# Altium PCB STM32WB55_DB_QFN68_IPD.PcbDoc
Units mm, origin at the board's own origin, x right, y up, seen from the top; angles counter-clockwise.
Board outline 30 x 40 mm, 2 copper layers (L1, L2), stack 1.57 mm thick; 32 components, 34 nets, 154 pads, 303 vias.
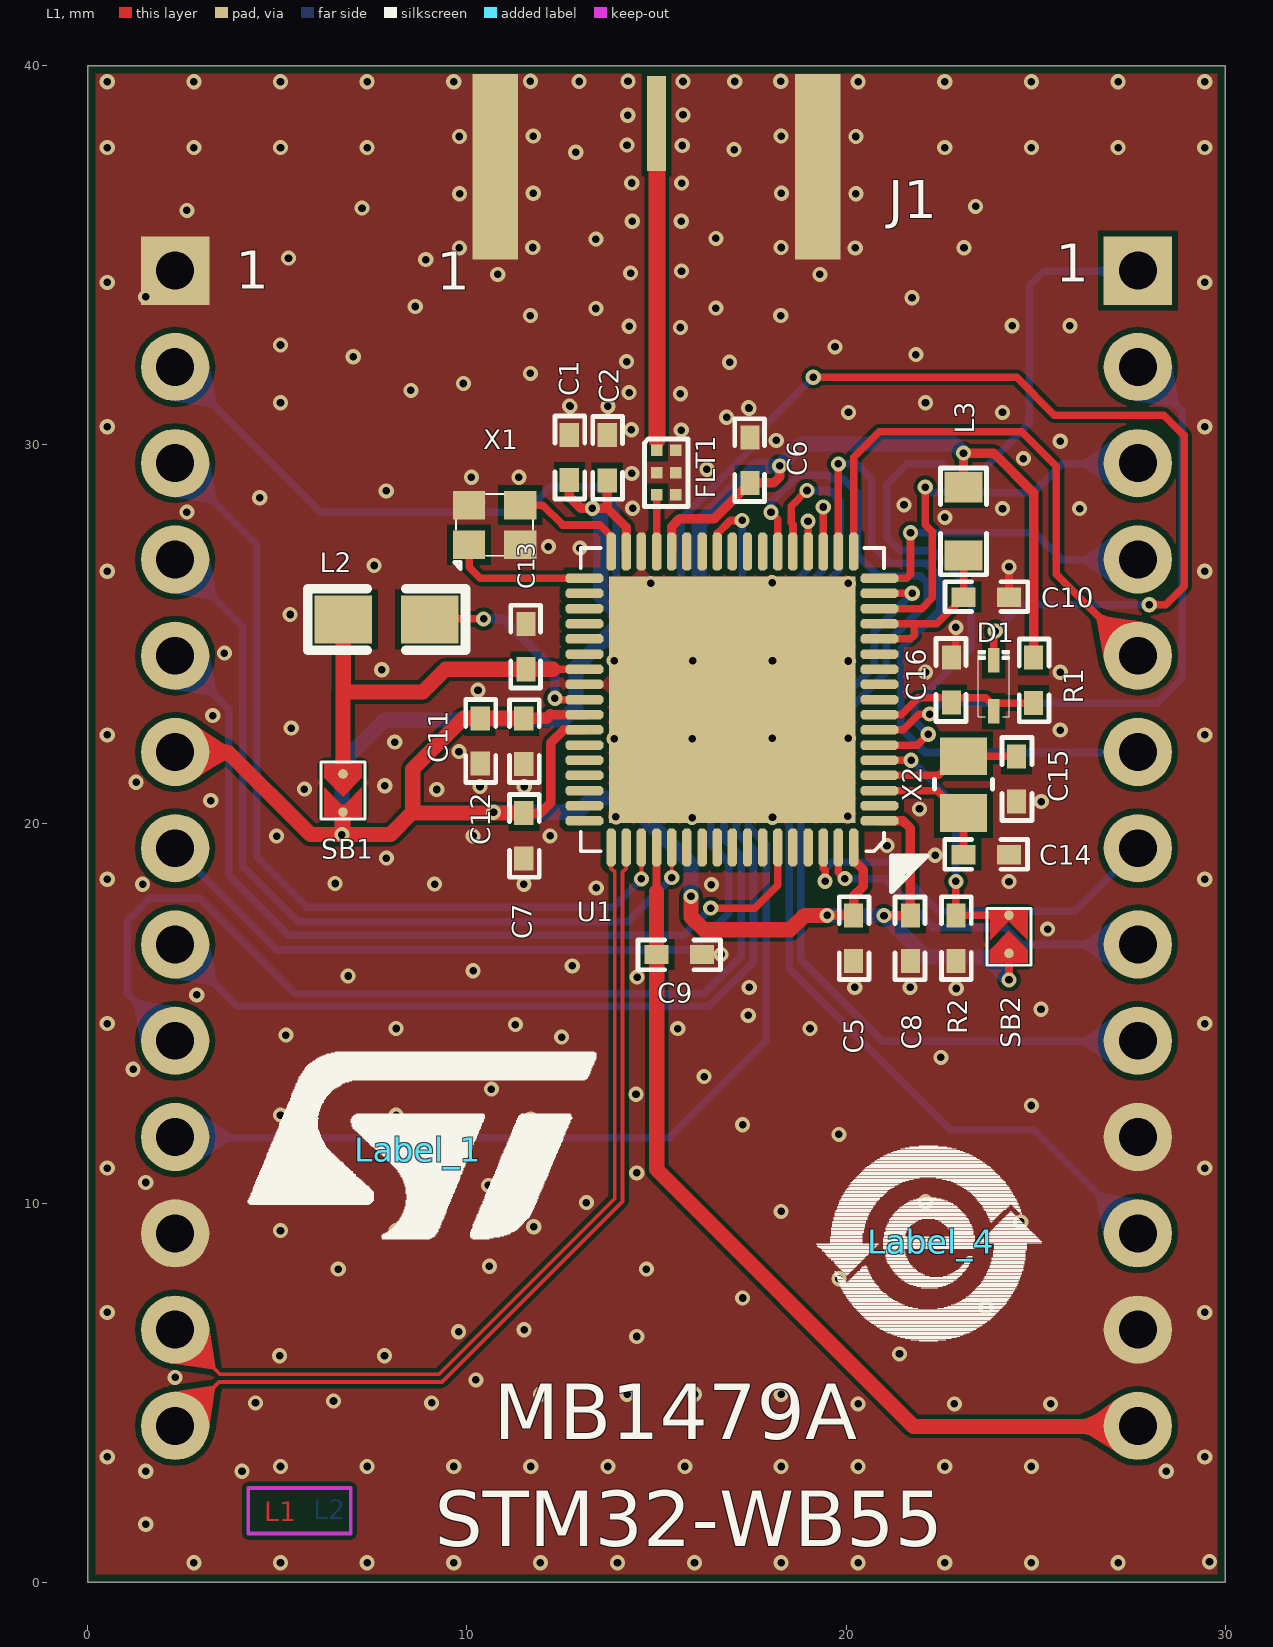
[diagram p0: L1 view]
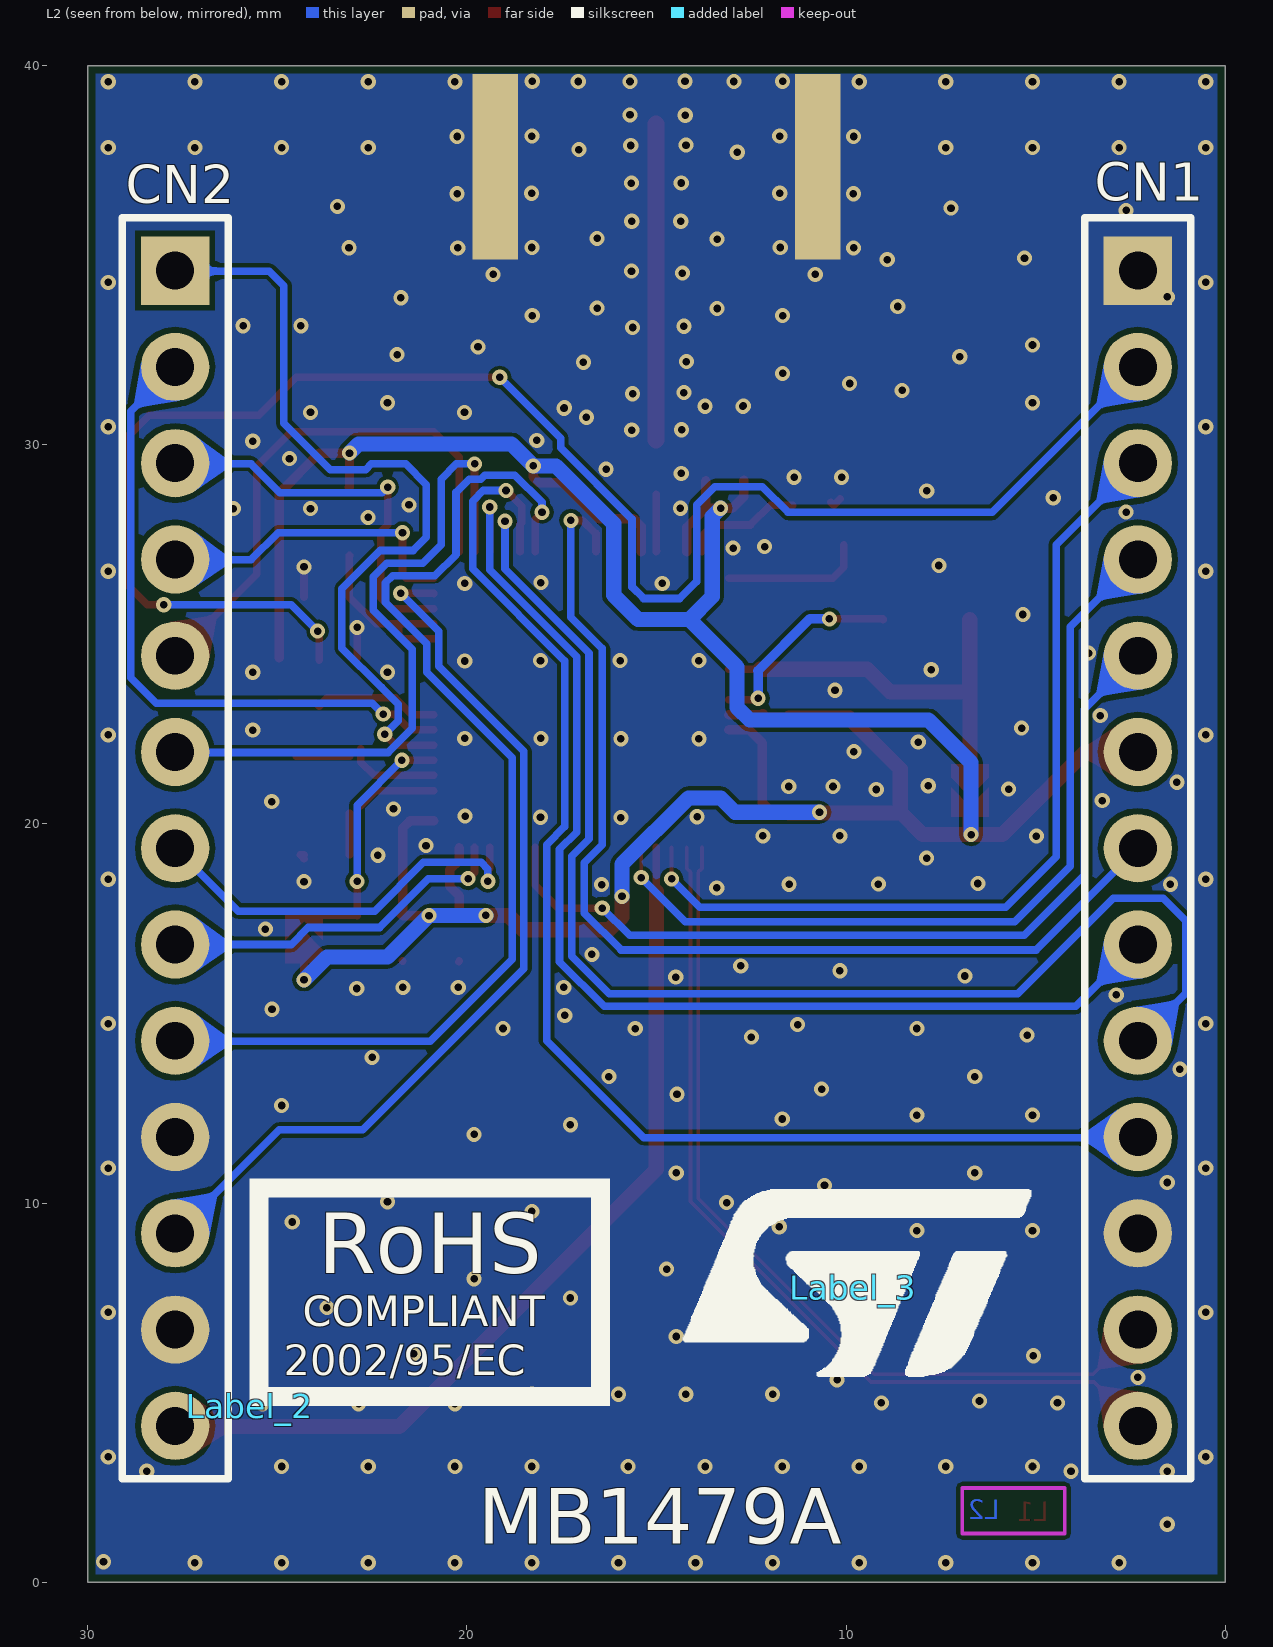
[diagram p1: L2 view, seen from below]

## Layer stack, top to bottom
Top Solder: solder mask 0.0178, Solder Resist, Dk 4
L1: signal copper 0.035
Dielectric1: core 1.5, FR-4, Dk 4.2
L2: signal copper 0.035
Bottom Solder: solder mask 0.0178, Solder Resist, Dk 4

## Board outline
0,0 0,40 30,40 30,0

## Design rules (kind name [scope] priority, off if disabled: settings)
AssemblyTestPointUsage [All] p1 off:
AssemblyTestpoint [All] p1 off: testpointundercomponent=TRUE minsize=1.016 maxsize=2.54 preferedsize=1.524 minholesize=0 maxholesize=1.016 preferedholesize=0.813 testpointgrid=0.025 usegrid=TRUE gridtolerance=0 allowsidetop=TRUE allowsidebottom=TRUE
BoardOutlineClearance [All] p1: gap=0.2 ignorepadtopadclearanceinfootprint=FALSE
Clearance Clearance_Antenne [InNetClass('Antenne') vs InNet('GND')] p1: gap=0.11 ignorepadtopadclearanceinfootprint=FALSE
Clearance [All] p2: gap=0.1 ignorepadtopadclearanceinfootprint=FALSE except(0.15: SMDPad-Poly THPad-Poly Poly-Region)
ComponentClearance ComponentClearance_SMA [InComponent('J2') vs InComponent('FLT1')] p1: gap=0 collisioncheckmode=3 verticalgap=0 showdistances=FALSE
ComponentClearance [All] p2: gap=0.21 collisioncheckmode=3 verticalgap=0.254 showdistances=FALSE
DiffPairsRouting [All] p1: maxlimit=0.1 minlimit=0.1 mostfreqgap=0.1 toplayer_minwidth=0.1 toplayer_maxwidth=0.1 toplayer_prefwidth=0.1 bottomlayer_minwidth=0.1 bottomlayer_maxwidth=0.1 bottomlayer_prefwidth=0.1 maxuncoupledlength=12.7
FabricationTestPointUsage TestPointUsage [All] p1 off: valid=0 allowmultiple=FALSE
FabricationTestpoint Testpoint [(IsPad And (OnTopLayer Or OnBottomLayer))] p1 off: side=3 testpointundercomponent=TRUE minsize=1.016 maxsize=2.54 preferedsize=1.524 minholesize=0 maxholesize=1.016 preferedholesize=0.813 testpointgrid=0.025 allowsidetop=TRUE allowsidebottom=TRUE usegrid=TRUE gridtolerance=0
FanoutControl Fanout_BGA [IsBGA] p1 off: bgadir=Out bgaviamode=Centered fanoutstyle=Auto fanoutdirection=Alternating viagrid=0.025 // Fanout_BGA (Default Rule)
FanoutControl Fanout_LCC [IsLCC] p2 off: bgadir=Out bgaviamode=Centered fanoutstyle=Auto fanoutdirection=Alternating viagrid=0.025 // Fanout_LCC (Default Rule)
FanoutControl Fanout_SOIC [IsSOIC] p3 off: bgadir=Out bgaviamode=Centered fanoutstyle=Auto fanoutdirection=Alternating viagrid=0.025 // Fanout_SOIC (Default Rule)
FanoutControl Fanout_Small [(CompPinCount < 5)] p4 off: bgadir=Out bgaviamode=Centered fanoutstyle=Auto fanoutdirection=OutThenIn viagrid=0.025 // Fanout_Small (Default Rule)
FanoutControl Fanout_Default [All] p5 off: bgadir=Out bgaviamode=Centered fanoutstyle=Auto fanoutdirection=Alternating viagrid=0.025 // Fanout_Default (Default Rule)
Height [All] p1 off: minheight=0 maxheight=25.4 prefheight=12.7
HoleSize [All] p1 off: absolutevalues=TRUE maxlimit=3.81 minlimit=0.1 maxpercent=80.000 minpercent=20.000
HoleToHoleClearance [All] p1 off: gap=0.254 allowstackedmicrovias=TRUE
LayerPairs [All] p1 off: enforce=FALSE
MinimumSolderMaskSliver [All] p1 off: minsoldermaskwidth=0.254
NetAntennae [All] p1 off: netantennaetolerance=0
PlaneClearance [All] p1 off: clearance=0.508
PlaneConnect [All] p1: planeconnectstyle=Direct reliefexpansion=0.508 reliefentries=4 reliefconductorwidth=0.254 reliefairgap=0.254
PolygonConnect DirectConnect [InPadClass('Direct Connect')] p1: connectstyle=Direct reliefconductorwidth=0.254 reliefentries=4 polygonreliefangle="90 Angle" airgapwidth=0.254
PolygonConnect [All] p2: connectstyle=Direct reliefconductorwidth=0.508 reliefentries=4 polygonreliefangle="90 Angle" airgapwidth=0.254
RoutingCorners [All] p1 off: cornerstyle=45-Degree minsetback=2.54 maxsetback=2.54
RoutingLayers [All] p1 off: top layer_v5=FALSE bottom layer_v5=FALSE
RoutingPriority [All] p1 off: routingpriority=0
RoutingTopology [All] p1 off: topology=Shortest
RoutingVias [All] p1: holewidth=0.3 width=0.4 viastyle="Through Hole" minholewidth=0.1 minwidth=0.2 maxholewidth=3.6 maxwidth=6 useviatemplates=TRUE viatemplateguid#1={28AEE74A-4C2B-48D5-92C5-F0BF58F084EF} viatemplatename#1=v40h20m0mx0
SilkToBoardRegionClearance [All] p1 off:
SilkToSilkClearance [All] p1: silktosilkclearance=0.2
SilkToSolderMaskClearance SilkscreenOverComponentPads [IsPad] p1 off: minsilkscreentomaskgap=0.254 clearancetoexposedcopper=TRUE
SolderMaskExpansion [All] p1: expansion=0.05
Width [All] p1: maxlimit=6 minlimit=0.075 preferedwidth=0.2 bottomlayer_minwidth=0.1 minimp=50.000000 maximp=50.000000 favimp=50.000000
4 further rules are at their usual default settings.

## Classes and differential pairs
pad class "Direct Connect": J2-2 U1-69
differential pair USB: +USB_P -USB_N

## Components (designator, comment, footprint, x,y, rotation, side; value= is the part's Value field where it differs from the comment)
C1 "100nF" 0402_CAP_NPOL 12.7,29.67 r270 top
C2 "100pF" 0402_CAP_NPOL 13.7,29.66 r270 top
C5 "100nF" 0402_CAP_NPOL 20.201,16.986 r270 top
C6 "100nF" 0402_CAP_NPOL 17.47,29.6 r90 top
C7 "100nF" 0402_CAP_NPOL 11.5,19.687 r270 top
C8 "100nF" 0402_CAP_NPOL 21.701,16.985 r90 top
C9 "100nF" 0402_CAP_NPOL 15.6,16.56 r180 top
C10 "100nF" 0402_CAP_NPOL 23.701,25.986 r0 top
C11 "4.7uF" 0402_CAP_NPOL 10.35,22.19 r270 top
C12 "100nF" 0402_CAP_NPOL 11.5,22.187 r270 top
C13 "4.7uF" 0402_CAP_NPOL 11.559,24.682 r90 top
C14 "4.3pF" 0402_CAP_NPOL 23.7,19.187 r0 top
C15 "4.3pF" 0402_CAP_NPOL 24.5,21.187 r270 top
C16 "100nF" 0402_CAP_NPOL 22.784,23.8 r90 top
CN1 "HEADER_1X13" "Header F 1x13x2.54 TH V" 2.3,34.6 r270 bottom locked
CN2 "HEADER_1X13" "Header F 1x13x2.54 TH V" 27.7,34.6 r270 bottom locked
D1 "BAT54K" SOD523 23.901,23.647 r90 top
FLT1 "IPD" IPD 15.258,29.27 r0 top
J1 "SMA_T_9.52_NF" SMA_T_9.52_NF 15,40.894 r90 top locked
L2 "10uH" 0805_COIL_H0.85 9.02,25.396 r180 top
L3 "IND_FCM1608KF-601T03" 0603_COIL 23.101,27.986 r270 top
Label_1 "LOGO_ST" LOGO_ST_Size3 8.71,11.42 r0 top
Label_2 "LOGO_ROHS" SYMBOL_RoHS 25.73,4.65 r180 bottom
Label_3 "LOGO_ST" LOGO_ST_Size3 9.81,7.78 r180 bottom
Label_4 "LOGO_ROHS" SYMBOL_RoHS_China 22.25,8.99 r0 top
R1 "100K" 0402_RES 24.95,23.79 r270 top
R2 "10K" 0402_RES 22.9,16.987 r270 top
SB1 "Open" SB-tiny 6.729,20.82 r270 top
SB2 "Open" SB-tiny 24.3,17.087 r90 top
U1 "STM32WBxx_QFN68" STM32WBxxx_QFN68 17.001,23.283 r180 top locked
X1 "NX2016_32M" NX2016_4P 10.73,27.89 r0 top
X2 "NX2012_32K768" NX2012_2P 23.1,20.287 r90 top

## Footprints (in the part's own frame and the unit in brackets; to place one, negate y for a bottom-side part, rotate by r counter-clockwise, add the part's x,y. Pads: shape width x height; smd on the part's side, far side on the other; paste and mask are expansions set on the pad)
0402_CAP_NPOL [mil] "Capacitor FootPrint 0402"
  rect 25x20 smd: 1(-23.58,0) 2(23.58,0)
  silkscreen extent -43,-15 43,16, body extent -39,-14 41,14, height 32
0402_RES [mil] "Resistor FootPrint 0402"
  rect 25x20 smd: 1(-23.58,0) 2(23.58,0)
  silkscreen extent -43,-15 43,16, body extent -38,-11 39,13, height 16
0603_COIL [mm] "Coil Footprint 0603"
  rect 0.8x1 smd: 1(-0.902,0) 2(0.902,0)
  silkscreen extent -1.41,-0.61 1.41,0.61, body extent -1.26,-0.48 1.26,0.48, height 0.4
0805_COIL_H0.85 [mil] "Coil FootPrint 0805"
  rect 60x50 smd: 1(0,0) 2(90,0)
  silkscreen extent -37,-32 127,32, body extent -21,-25 113,25, height 33
"Header F 1x13x2.54 TH V" [mm] "1x13x2.54 Header TH V Female"
  rect 1.8x1.8 hole 1: 1(0,0)
  round 1.8 hole 1: 2(2.54,0) 3(5.08,0) 4(7.62,0) 5(10.16,0) 6(12.7,0) 7(15.24,0) 8(17.78,0) 9(20.32,0) 10(22.86,0) 11(25.4,0) 12(27.94,0) 13(30.48,0)
  silkscreen extent -1.4,-1.4 31.88,1.4, body extent -1.42,-1.33 31.88,1.17, height 8.54
IPD [mm]
  rect 0.3x0.3 smd mask-0.05: 1(0.25,-0.587) 2(0.25,0) 3(0.25,0.587) 4(-0.25,0) 5(-0.25,-0.587) 6(-0.25,0.587)
  silkscreen extent -0.57,-0.89 0.58,0.89
LOGO_ST_Size3 [mm]
  silkscreen extent -4.5,-2.36 4.7,2.57
NX2012_2P [mm]
  rect 1x1.25 smd: 1(0,0) 2(1.5,0)
  silkscreen extent 0.63,-0.76 0.89,0.76, body extent -0.33,-0.76 1.88,0.76, height 0.75
NX2016_4P [mm]
  rect 0.85x0.75 smd: 1(-0.675,-0.525) 2(0.675,-0.525) 3(0.675,0.525) 4(-0.675,0.525)
  silkscreen extent -1.07,-1.16 1.02,0.81, body extent -1,-0.8 1,0.8, height 0.7
SB-tiny [mil]
  round 10 smd paste-10 mask+0.04: 1(-19.69,0)
  round 10 smd paste-10.08 mask+0.04: 2(20,0)
  L1 region: -5.91,19.69 13.78,0 -5.91,-19.68 25,-19.68 25,19.69
  L1 region: -30,-19.68 -30,19.69 -15.75,19.69 3.94,0 -15.75,-19.68
  silkscreen extent -32,-23 27,23
SMA_T_9.52_NF [mm]
  rect 2.5x0.5 smd: 1(-2.413,0)
  rect 4.9x1.2 smd: 2(-3.556,-4.25) 2(-3.556,4.25)
  rect 4.9x1.2 smd far side: 2(-3.556,-4.25) 2(-3.556,4.25)
SOD523 [mm]
  rect 0.65x0.3 smd mask+0.05: A(-0.675,0) K(0.675,0)
  silkscreen extent -0.81,-0.41 0.91,0.41, body extent -0.81,-0.41 0.81,0.41, height 0.62
STM32WBxxx_QFN68 [mm] "VFQFPN68_8x8x0.1_p0.4"
  oct 1x0.25 smd mask+0.04: 1(-3.878,3.2) 2(-3.878,2.8) 3(-3.878,2.4) 4(-3.878,2) 5(-3.878,1.6) 6(-3.878,1.2) 7(-3.878,0.8) 8(-3.878,0.4) 9(-3.878,0) 10(-3.878,-0.4) 11(-3.878,-0.8) 12(-3.878,-1.2) 13(-3.878,-1.6) 14(-3.878,-2) 15(-3.878,-2.4) 16(-3.878,-2.8) 17(-3.878,-3.2) 35(3.903,-3.2) 36(3.903,-2.8) 37(3.903,-2.4) 38(3.903,-2) 39(3.903,-1.6) 40(3.903,-1.2) 41(3.903,-0.8) 42(3.903,-0.4) 43(3.903,0) 44(3.903,0.4) 45(3.903,0.8) 46(3.903,1.2) 47(3.903,1.6) 48(3.903,2) 49(3.903,2.4) 50(3.903,2.8) 51(3.903,3.2)
  oct 0.25x1 smd mask+0.04: 18(-3.2,-3.903) 19(-2.8,-3.903) 20(-2.4,-3.903) 21(-2,-3.903) 22(-1.6,-3.903) 23(-1.2,-3.903) 24(-0.8,-3.903) 25(-0.4,-3.903) 26(0,-3.903) 27(0.4,-3.903) 28(0.8,-3.903) 29(1.2,-3.903) 30(1.6,-3.903) 31(2,-3.903) 32(2.4,-3.903) 33(2.8,-3.903) 34(3.2,-3.903) 52(3.2,3.903) 53(2.8,3.903) 54(2.4,3.903) 55(2,3.903) 56(1.6,3.903) 57(1.2,3.903) 58(0.8,3.903) 59(0.4,3.903) 60(0,3.903) 61(-0.4,3.903) 62(-0.8,3.903) 63(-1.2,3.903) 64(-1.6,3.903) 65(-2,3.903) 66(-2.4,3.903) 67(-2.8,3.903) 68(-3.2,3.903)
  rect 6.5x6.5 smd paste-5 mask-0.01: 69(0,0)
  silkscreen extent -5.14,-4 4,5.07, body extent -4.01,-3.99 3.99,3.99, height 1.2
SYMBOL_RoHS [mm]
  silkscreen extent 0,0 9.5,6
SYMBOL_RoHS_China [mm]
  silkscreen extent -3.03,-2.62 2.91,2.53

## Part data
C1 C2 C5 C6 C7 C8 C9 C10 C11 C12 C13 C14 C15 C16: library part CAP_NPOL, "Capacitor_not polarized"
D1: "Schottky Diode"
L2: library part IND_LQM21FN100M70L, "Coil Murata 10uH ref: LQM21FN100M70L", Manufacturer=Murata, Part Number=LQM21FN100M70L
R1 R2: library part RES, "Resistor"
SB1 SB2: library part Strap2, "Solder Jumper", Published=24-Mar-1999, Publisher="Altium Limited", Revision="July-2002: Re-released for DXP Platform.", Solder=YES
X1: "Crystal NDK 2.0x1.6mm  32 MHz", Manufacturer=NDK, Manufacturer P/N="NX2016SA 32 MHz EXS00A-CS06654"
X2: "Crystal NDK 2.0x1.2mm  32.768 KHz", Manufacturer=NDK, Manufacturer P/N="NX2012SA 32.768KHz  EXS00A-MU00389"
Label_1 Label_2 Label_3 Label_4: Silkscreen Only=YES

## Via types
v1: diameter 0.4, hole 0.2, L1 to L2, tented both sides, 303 vias

## Nets (pads, with @x,y where several pads share a name; then routed paths per layer and width w, separated by ;. In a path a pad name is that pad's centre, name@x,y a point inside that pad or via, vN(x,y) a via of type N, cw(c..) or ccw(c..) an arc to the next point about the centre after c; other vN are vias at no path point)
3V3: C1.2 C2.2 C5.1 C6.1 C7.1 C8.2 C11.1 C12.1 CN1.6 L3.1 R1.1 SB1.2 SB2.1 U1.1 U1.30 U1.33 U1.44 U1.45 U1.68 | length 87.9
  L1 w0.2: CN1.6 CN1.6@2.313,21.887 ; C5.1@20.199,17.587 C5.1 ; v1(24.3,15.887) SB2.1
  L1 w0.25: C7.1 11.936,20.286 12.206,20.556 12.206,22.138 12.551,22.483 U1.45 ; 12.201,22.883 U1.44 ; C1.2@12.701,29.071 12.701,28.629 12.991,28.339 12.992,28.34 13.002,28.33 v1(13.31,28.33) 13.701,28.33 ; C2.2 13.701,28.33 ; U1.33 14.201,27.83 13.701,28.33 ; U1.30 15.401,27.85 15.611,28.06 16.529,28.06 C6.1 18.093,29.001 18.25,29.158 v1(18.25,29.45) ; v1(19.5,17.587) C5.1@20.199,17.587 ; C5.1 20.201,18.1 20.46,18.359 20.46,18.792 20.201,19.051 U1.68 ; U1.1 21.504,20.083 21.701,19.886 21.701,17.687 21.804,17.687 C8.2 v1(21.003,17.584) ; L3.1 L3.1 v1(23.1,29.787) 23.9,29.787 24.95,28.737 R1.1
  L1 w0.3: C12.1@11.497,22.789 C12.1 12.104,22.786 12.201,22.883
  L1 w0.4: CN1.6@2.313,21.887 3.701,21.887 5.868,19.72 v1(6.7,19.72) 6.7,20.283 SB1.2 6.729,19.72 7.978,19.72 8.544,20.286 C7.1 ; 8.57,20.312 8.57,21.453 9.906,22.789 C11.1 C12.1@11.497,22.789 ; v1(15.91,18.09) 15.91,17.55 16.25,17.21 18.525,17.21 18.902,17.587 v1(19.5,17.587)
  L2 w0.4: v1(6.7,19.72) 6.7,21.62 7.82,22.74 12.54,22.74 12.874,23.074 12.874,24.144 14.13,25.4 ; v1(10.699,20.31) 12.925,20.31 13.305,20.69 14.16,20.69 15.91,18.94 v1(15.91,18.09) ; v1(13.31,28.33) 13.53,28.11 13.53,26 14.13,25.4 ; v1(19.5,17.587) 21,17.587 v1(21.003,17.584) 22.097,16.49 23.697,16.49 v1(24.3,15.887) ; v1(23.1,29.787) 22.865,30.022 18.822,30.022 v1(18.25,29.45) 17.65,29.45 16.13,27.93 16.13,26.038 15.492,25.4 14.13,25.4
GND: C1.1 C2.1 C5.2 C6.2 C7.2 C8.1 C9.1 C10.2 C11.2 C12.2 C13.2 C14.2 C15.2 C16.2 CN1.1 CN1.11 CN2.10 CN2.12 FLT1.1 FLT1.2 FLT1.3 FLT1.4 J1.2 R2.2 U1.32 U1.42 U1.69 X1.2 X1.4 | length 2.2
  L1 w0.2: X1.4@10.152,28.585 10.326,28.411 X1.4@10.402,28.487 ; C5.2 C5.2@20.218,16.37 ; C8.1@21.69,16.375 C8.1 ; C16.2@22.901,24.385 v1(22.901,25.186) ; C14.2 24.4,19.187 C14.2@24.3,19.087 ; C10.2 v1(24.3,26.785)
  other v1: 2.794,0.508 5.08,0.508 7.366,0.508 9.652,0.508 11.938,0.508 13.97,0.508 16.002,0.508 18.288,0.508 20.32,0.508 22.606,0.508 24.892,0.508 27.178,0.508 29.591,0.533 1.524,1.524 1.524,2.921 4.064,2.921 28.448,2.921 5.08,3.048 7.366,3.048 9.652,3.048 11.684,3.048 13.716,3.048 15.748,3.048 18.288,3.048 20.32,3.048 22.606,3.048 24.892,3.048 0.508,3.302 29.464,3.302 20.32,4.699 22.86,4.699 25.4,4.699 4.42,4.724 9.068,4.724 6.477,4.775 11.938,4.953 14.224,4.953 16.002,4.953 18.288,4.953 10.236,5.334 2.3,5.4 5.055,5.969 7.823,5.969 21.412,6.02 14.478,6.477 9.779,6.604 11.506,6.655 0.508,7.112 29.464,7.112 23.698,7.239 17.272,7.493 19.812,8.001 6.604,8.255 14.732,8.255 10.592,8.331 5.08,9.271 8.128,9.271 11.76,9.373 24.613,9.5 18.288,9.779 13.15,10.01 22.098,10.033 10.566,10.465 1.524,10.541 6.604,10.795 14.478,10.795 0.508,10.922 29.464,10.922 19.812,11.811 17.272,12.065 11.684,12.217 5.08,12.319 8.128,12.319 24.892,12.573 14.46,12.87 10.643,13.005 6.604,13.335 16.256,13.335 1.19,13.53 22.504,13.843 12.497,14.376 5.22,14.43 15.56,14.6 8.128,14.605 19.05,14.605 11.278,14.707 0.508,14.732 29.464,14.732 17.42,14.95 25.146,15.113 2.87,15.49 22.909,15.66 17.448,15.69 20.229,15.69 21.69,15.69 14.49,15.961 6.864,15.99 10.16,16.129 12.776,16.256 16.706,16.56 25.32,17.228 13.411,18.313 1.44,18.41 11.5,18.41 16.45,18.4 6.52,18.43 9.144,18.415 24.3,18.48 0.508,18.542 29.464,18.542 7.872,19.1 22.352,19.177 21.082,19.431 4.976,19.68 10.16,19.685 12.192,19.685 15.94,20.17 18.06,20.18 13.93,20.19 20.05,20.21 21.94,20.4 25.15,20.59 3.24,20.616 5.71,20.92 9.2,20.91 10.344,20.99 11.51,20.99 7.829,21.01 1.27,21.1 9.79,21.91 8.095,22.16 13.88,22.25 15.94,22.25 18.05,22.26 20.06,22.26 0.508,22.352 29.464,22.352 25.654,22.479 5.365,22.53 3.29,22.86 10.29,23.53 22.098,24.003 25.654,24.003 7.753,24.07 20.06,24.3 13.88,24.31 15.96,24.31 18.06,24.31 3.6,24.51 5.334,25.527 14.85,26.35 20.06,26.35 18.05,26.37 0.508,26.67 29.464,26.67 7.55,26.82 12.98,27.28 12.147,27.32 22.61,28.09 2.61,28.23 14.37,28.33 24.13,28.321 26.162,28.321 21.53,28.42 4.53,28.61 7.87,28.79 10.115,29.15 11.37,29.15 14.349,29.251 16.329,29.361 24.682,29.64 25.654,30.099 18.16,30.12 15.654,30.391 14.339,30.401 0.508,30.48 29.464,30.48 16.849,30.731 20.066,30.861 24.13,30.861 17.429,30.981 17.44,30.97 12.709,31.031 12.72,31.02 13.719,31.021 5.08,31.115 22.098,31.115 15.632,31.351 14.279,31.381 8.52,31.44 9.906,31.623 11.673,31.888 14.213,32.201 16.929,32.181 7,32.33 21.844,32.385 19.71,32.588 5.08,32.639 15.63,33.101 14.279,33.133 24.384,33.147 25.908,33.147 11.673,33.412 18.277,33.412 13.4,33.601 16.569,33.611 8.636,33.655 21.742,33.884 1.524,33.909 0.508,34.29 29.464,34.29 10.81,34.5 19.31,34.5 14.317,34.537 15.66,34.587 8.91,34.89 5.29,34.93 9.8,35.2 11.735,35.211 18.289,35.211 20.246,35.2 23.114,35.204 13.4,35.431 16.569,35.451 14.359,35.902 15.654,35.902 2.61,36.19 7.23,36.25 23.419,36.297 9.805,36.63 11.749,36.641 18.294,36.641 20.26,36.63 14.349,36.912 15.664,36.91 12.869,37.722 17.049,37.792 0.508,37.846 2.794,37.846 5.08,37.846 7.366,37.846 22.606,37.846 24.892,37.846 27.178,37.846 29.464,37.846 14.222,37.912 15.679,37.902 9.798,38.14 20.26,38.14 11.749,38.151 18.286,38.151 14.242,38.701 15.699,38.711 0.508,39.586 2.794,39.586 5.08,39.586 7.366,39.586 9.652,39.586 12.956,39.591 15.699,39.591 17.067,39.591 20.32,39.586 22.606,39.586 24.892,39.586 27.178,39.586 29.464,39.586 11.673,39.597 14.249,39.597 18.277,39.597
NetC10_1: C10.1 L3.2 U1.13 U1.14 | length 4.9
  L1 w0.2: U1.13 21.698,24.883 21.801,24.986 21.801,25.283 ; U1.14 21.801,25.283 ; L3.2 23.102,27.083 C10.1 22.399,25.283 21.801,25.283
NetC13_1: C13.1 L2.2 SB1.1 U1.41 | length 10.7
  L1 w0.2: 12.268,24.083 U1.41
  L1 w0.4: 6.724,23.496 6.734,23.486 ; SB1.1 6.729,23.481 8.834,23.481 9.435,24.083 C13.1 12.268,24.083 ; 6.734,23.496 L2.2
NetC14_1: C14.1 U1.3 X2.1 | length 3.2
  L1 w0.2: U1.3 22.404,20.883 X2.1@22.801,20.486 ; X2.1 C14.1 ; C14.1 C14.1
NetC15_1: C15.1 U1.4 X2.2 | length 3.8
  L1 w0.2: U1.4 22.451,21.283 22.799,21.631 X2.2@22.799,21.986 ; X2.2 X2.2 C15.1
NetC16_1: C16.1 D1.A R1.2 U1.8 | length 4.4
  L1 w0.2: U1.8 21.453,22.883 21.9,23.33 23.682,23.33 23.901,23.111 23.977,23.187 R1.2@24.95,23.187
NetCN1_2: CN1.2 D1.K | length 45.4
  L1 w0.2: v1(19.138,31.787) 24.5,31.787 25.5,30.787 28.383,30.787 28.92,30.25 28.92,26.27 28.437,25.787 v1(28,25.787) ; D1.K 23.901,25.051 v1(23.94,25.09)
  L2 w0.2: CN1.2 6.14,28.22 11.53,28.22 12.21,28.9 13.459,28.9 13.94,28.419 13.94,26.399 14.389,25.95 15.342,25.95 15.646,26.254 15.646,28.046 17.53,29.93 17.53,30.179 v1(19.138,31.787) ; v1(23.94,25.09) 24.637,25.787 v1(28,25.787)
NetCN1_3: CN1.3 U1.54 | length 23.3
  L1 w0.1: v1(14.6,18.55) 14.6,18.488 v1@14.601,18.487 ; U1.54 v1@14.601,18.487 ; v1@14.601,18.487 14.61,18.478 14.601,18.469 v1@14.601,18.487
  L2 w0.2: CN1.3 4.45,27.37 4.45,19.137 5.788,17.799 13.859,17.799 14.6,18.54 v1(14.6,18.55)
NetCN1_4: CN1.4 U1.56 | length 22.1
  L1 w0.1: v1@15.401,18.475 v1(15.401,18.586) U1.56
  L2 w0.2: CN1.4 4.08,25.2 4.08,18.891 5.551,17.42 14.235,17.42 v1(15.401,18.586)
NetCN1_5: CN1.5 U1.63 | length 23.1
  L1 w0.2: v1(16.43,17.78) 17.595,17.78 18.201,18.386 U1.63
  L2 w0.2: CN1.5 3.709,23.031 3.709,18.651 5.3,17.06 15.71,17.06 v1(16.43,17.78)
NetCN1_7: CN1.7 U1.27 | length 28.3
  L1 w0.21: U1.27 16.601,27.661 16.95,28.01 v1(17.26,28.01)
  L2 w0.2: CN1.7 4.984,16.676 15.937,16.676 16.91,17.649 16.91,18.979 16.43,19.459 16.43,24.63 17.26,25.46 v1(17.26,28.01)
NetCN1_8: CN1.8 U1.20 | length 30.7
  L1 w0.2: v1(19.4,28.365) 19.401,28.364 U1.20
  L2 w0.2: CN1.8 3.934,15.186 16.376,15.186 17.56,16.37 17.56,19.33 17.106,19.784 17.106,24.41 19.401,26.705 19.401,28.364 v1(19.4,28.365)
NetCN1_9: CN1.9 U1.21 | length 35.5
  L1 w0.2: v1(18.997,27.99) 19.001,27.986 U1.21
  L2 w0.2: CN1.9 1.04,15.54 1.04,17.45 1.63,18.04 2.95,18.04 5.471,15.519 16.249,15.519 17.24,16.51 17.24,19.147 16.78,19.607 16.78,24.509 19.001,26.73 18.997,26.734 v1(18.997,27.99) ; CN1.9@2.643,14.623 CN1.9@3,14.267
NetCN1_10: CN1.10 U1.22 | length 34.2
  L1 w0.2: U1.22 18.601,27.899 18.552,27.948 18.552,28.382 v1(18.97,28.8)
  L2 w0.2: CN1.10@3,11.737 3.01,11.727 15.34,11.727 17.9,14.287 17.9,19.455 17.42,19.935 17.42,24.3 19.85,26.73 19.85,28.518 19.568,28.8 v1(18.97,28.8)
NetCN2_1: CN2.1 U1.6 | length 21.4
  L1 w0.2: U1.6 21.883,22.083 v1(22.17,22.37)
  L2 w0.2: v1(22.17,22.37) 21.81,22.73 21.81,23.156 22.257,23.603 22.264,23.603 23.301,24.64 23.301,26.209 22.293,27.217 21.423,27.217 21.07,27.57 21.07,28.95 21.62,29.5 22.52,29.5 22.67,29.35 23.609,29.35 24.83,30.571 24.83,34.2 25.217,34.587 CN2.1@27.7,34.587
NetCN2_2: CN2.2 U1.7 | length 17.2
  L1 w0.2: U1.7 21.507,22.483 21.924,22.9 v1(22.21,22.9)
  L2 w0.2: v1(22.21,22.9) 22.497,23.187 28.197,23.187 28.87,23.86 28.87,30.89 CN2.2
NetCN2_3: CN2.3 U1.15 | length 10.5
  L1 w0.2: U1.15 21.998,25.683 22.28,25.965 22.28,27.71 22.09,27.9 v1(22.09,28.89)
  L2 w0.2: v1(22.09,28.89) 22.237,28.743 24.936,28.743 25.7,29.507 CN2.3@27.7,29.507
NetCN2_4: CN2.4 U1.17 | length 8.3
  L1 w0.2: U1.17 21.598,26.483 21.701,26.586 v1(21.701,27.686)
  L2 w0.2: v1(21.701,27.686) 24.981,27.686 25.7,26.967 CN2.4@27.7,26.967
NetCN2_5: CN2.5 U1.18 | length 14.4
  L1 w0.2: U1.18 20.201,29.675 20.876,30.35 24.637,30.35 25.55,29.437 25.55,26.59 CN2.5
NetCN2_6: CN2.6 U1.19 | length 18.2
  L1 w0.2: v1(19.8,29.5) v1(19.8,29.5) 19.801,27.92 19.8,27.919 U1.19 U1.19
  L2 w0.2: v1(19.8,29.5) 20.279,29.5 20.68,29.099 20.68,27.37 21.169,26.881 22.119,26.881 22.479,26.521 22.479,25.639 21.446,24.606 21.446,22.524 22.083,21.887 CN2.6@27.7,21.887
NetCN2_7: CN2.7 U1.66 | length 10.8
  L1 w0.2: U1.66 19.401,18.829 19.45,18.78 v1(19.45,18.49)
  L2 w0.2: v1(19.45,18.49) 19.45,18.81 19.627,18.987 21.153,18.987 22.44,17.7 26.04,17.7 CN2.7
NetCN2_8: CN2.8 U1.67 | length 8.7
  L1 w0.2: U1.67 19.801,18.729 v1(19.97,18.56)
  L2 w0.2: v1(19.97,18.56) 21.017,18.56 22.307,17.27 24.187,17.27 24.637,16.82 CN2.8@26.987,16.82 ; CN2.8@27,16.807 CN2.8@26.987,16.82 ; CN2.8@27,16.82 CN2.8@26.987,16.82
NetCN2_9: CN2.9 U1.23 | length 29
  L1 w0.2: v1(18.021,28.226) 18.201,28.046 U1.23
  L2 w0.2: v1(18.021,28.226) 18.021,28.488 18.738,29.206 19.529,29.206 19.634,29.1 19.94,29.1 20.29,28.75 20.29,27.11 20.85,26.55 21.96,26.55 22.151,26.359 22.151,25.851 21.06,24.76 21.06,24 18.81,21.75 18.81,16.43 20.973,14.267 CN2.9@27.7,14.267
NetCN2_11: CN2.11 U1.16 | length 24.2
  L1 w0.2: U1.16 20.886,26.09 v1(21.75,26.09)
  L2 w0.2: v1(21.75,26.09) 20.74,25.08 20.74,24.16 18.501,21.921 18.501,16.186 22.757,11.93 24.957,11.93 CN2.11@27.7,9.187
NetFLT1_5: FLT1.5 U1.31 | length 1.5
  L1 w0.2: U1.31@14.99,27.197 U1.31@14.991,27.198 ; U1.31@14.994,27.193 U1.31 15.002,27.187 FLT1.5@15.002,28.693
NetFLT1_6: FLT1.6 J1.1 | length 8.3
  L1 w0.45: 15.011,30.13 J1.1@15.011,38.47
NetL2_1: L2.1 U1.43 | length 5.4
  L1 w0.2: L2.1 9.034,25.41 v1(10.437,25.41) ; v1(12.32,23.32) 12.357,23.283 U1.43
  L2 w0.25: v1(10.437,25.41) 10.96,25.41 12.33,24.04 12.32,24.03 v1(12.32,23.32)
NetR2_1: R2.1 SB2.2 U1.5 | length 6.8
  L1 w0.2: U1.5 v1(21.717,21.683) ; v1(22.9,18.487) R2.1 22.909,17.595 SB2.2
  L2 w0.2: v1(21.717,21.683) 22.9,20.5 v1(22.9,18.487)
NetU1_34: U1.34 X1.3 | length 3.1
  L1 w0.2: X1.3 11.995,28.415 12.52,27.89 13.509,27.89 13.801,27.598 U1.34
NetU1_35: U1.35 X1.1 | length 3.8
  L1 w0.2: X1.1 10.055,26.775 10.347,26.483 U1.35
USB_N: CN1.12 U1.52 | length 23.3
  L1 w0.1: CN1.12 3.48,5.48 9.257,5.48 13.901,10.124 13.901,18.73 13.801,18.83 U1.52
USB_P: CN1.13 U1.53 | length 23.6
  L1 w0.1: CN1.13 3.46,5.28 9.34,5.28 14.101,10.041 14.101,18.73 14.201,18.83 U1.53
VDDUSB: C9.2 CN2.13 U1.55 | length 24
  L1 w0.15: 15.001,18.227 15.005,18.223
  L1 w0.2: 15.001,18.227 U1.55
  L1 w0.4: C9.2 15.001,18.219 ; C9.2@15.005,16.56 15.005,10.885 21.783,4.107 CN2.13@27.7,4.107
pads on no net: U1.2 U1.9 U1.10 U1.11 U1.12 U1.24 U1.25 U1.26 U1.28 U1.29 U1.36 U1.37 U1.38 U1.39 U1.40 U1.46 U1.47 U1.48 U1.49 U1.50 U1.51 U1.57 U1.58 U1.59 U1.60 U1.61 U1.62 U1.64 U1.65

## Polygon pours and split planes (outlines as drawn)
GND on L2 "GND_L02_P029" (solid, remove dead copper, pour order 29): 0,40 30,40 30,-1 0,-1
GND on L1 "GND_L01_P028" (solid, remove dead copper, pour order 28): 0,40 30,40 30,0 0,0

## Keep-outs
Keep-Out Layer:
  lines w0.1: 4.23,1.283 6.93,1.283 6.93,2.483 4.23,2.483 4.23,1.283

## Other copper
L1:
  text "L1" at 4.648,1.6 h0.51
  text "LAYER TOP" at 12,-25 h1.52
L2:
  text "L2" at 5.944,1.651 h0.51
  text "LAYER BOTTOM" at 12,-25 h1.52

## Silkscreen, mask and mechanical layers (free items; w line width, h text height)
Top Overlay:
  text "1" at 25.532,34.307 h1
  text "1" at 3.902,34.127 h1
  text "1" at 9.2,34.1 h1
  text "MB1479A" at 10.71,3.28 h2.5
  text "STM32-WB55" at 9.15,0.45 h2.5
  text "SILKSCREEN TOP" at 12,-25 h1.52
Bottom Overlay:
  text "MB1479A" at 19.7,0.52 h2.5
  text "SILKSCREEN BOTTOM" at 12,-25 h1.52
Top Paste:
  text "TOP PASTE" at 12,-25 h1.52
Top Solder:
  the board outline again, w0.3
  text "TOP SOLDER" at 12,-25 h1.52
Bottom Solder:
  the board outline again, w0.3
  text "BOTTOM SOLDER" at 12,-25 h1.52
Mechanical 1:
  the board outline again, w0.1
Fiche Gerber:
  text "BOARD : STM32WB55_DB_QFN68_P" at 0,-19 h1.52
  text "REV   : A" at 0,-22 h1.52
  text "FILM  :" at 0,-25 h1.52
  text "DRAWN : CENTUM-ADENEO" at 0,-28 h1.52
  text "DATE  : 2017/45" at 0,-31 h1.52
Drill Drawing:
  lines w0.1: -60.299,-30.207 -59.966,-30.207 -59.966,-30.54 -59.299,-30.54 -59.299,-30.207 -58.966,-30.207 -58.966,-29.54 -59.299,-29.54 -59.299,-29.207 -59.966,-29.207 -59.966,-29.54 -60.299,-29.54 -60.299,-30.207 ; -60.299,-27.54 -59.633,-27.207 -58.966,-27.54 -59.299,-26.873 -58.966,-26.207 -59.633,-26.54 -60.299,-26.207 -59.966,-26.873 -60.299,-27.54
  lines w0.2: -61.464,-31.44 87.854,-31.44 ; -61.464,-25.44 87.854,-25.44 ; -50.766,-34.44 -50.766,-22.44 ; -38.97,-34.44 -38.97,-22.44 ; -24.854,-34.44 -24.854,-22.44 ; -15.056,-34.44 -15.056,-22.44 ; -0.7,-34.44 -0.7,-22.44 ; 22.773,-34.44 22.773,-22.44 ; 34.25,-34.44 34.25,-22.44 ; 60.602,-34.44 60.602,-22.44 ; -61.464,-34.44 87.854,-34.44 87.854,-22.44 -61.464,-22.44 -61.464,-34.44
  text "Symbol" at -59.664,-24.54 h1.44
  text "Count" at -49.866,-24.54 h1.44
  text "Hole Size" at -38.07,-24.54 h1.44
  text "Plated" at -23.954,-24.54 h1.44
  text "Hole Type" at -14.156,-24.54 h1.44
  text "Drill Layer Pair" at 0.2,-24.54 h1.44
  text "Via/Pad" at 23.673,-24.54 h1.44
  text "Hole Tolerance (+)" at 35.15,-24.54 h1.44
  text "Hole Tolerance (-)" at 61.502,-24.54 h1.44
  text "303" at -49.866,-27.54 h1.2
  text "0.20mm" at -38.07,-27.54 h1.2
  text "PTH" at -23.954,-27.54 h1.2
  text "Round" at -14.156,-27.54 h1.2
  text "L1 - L2" at 0.2,-27.54 h1.2
  text "Via" at 23.673,-27.54 h1.2
  text "26" at -49.866,-30.54 h1.2
  text "1.00mm" at -38.07,-30.54 h1.2
  text "PTH" at -23.954,-30.54 h1.2
  text "Round" at -14.156,-30.54 h1.2
  text "L1 - L2" at 0.2,-30.54 h1.2
  text "Pad" at 23.673,-30.54 h1.2
  text "329 Total" at -49.866,-33.54 h1.2

## Dimensions
0,0 to 2.3,4.12 on Drill Drawing
0,0 to 2.3,4.12 on Drill Drawing
0,0 to 0,40 on Drill Drawing
0,0 to 30,0 on Drill Drawing

## Text inside footprints (layer, text, board x,y; h text height)
Label_2: Bottom Overlay "2002/95/EC" at 24.83,5.456 h0.8; Bottom Overlay "COMPLIANT" at 24.33,6.75 h0.8; Bottom Overlay "RoHS" at 23.93,8.15 h1.6